# Altium PCB bikelight.pcbdoc
Units mil, origin at the board's own origin, x right, y up, seen from the top; angles counter-clockwise.
Board outline 2086.61 x 787.4 mil, 2 copper layers (Top Layer, Bottom Layer), stack 63.824 mil thick; 17 components, 13 nets, 46 pads, 0 vias.
Unrouted connection lines stored in the file: 1.
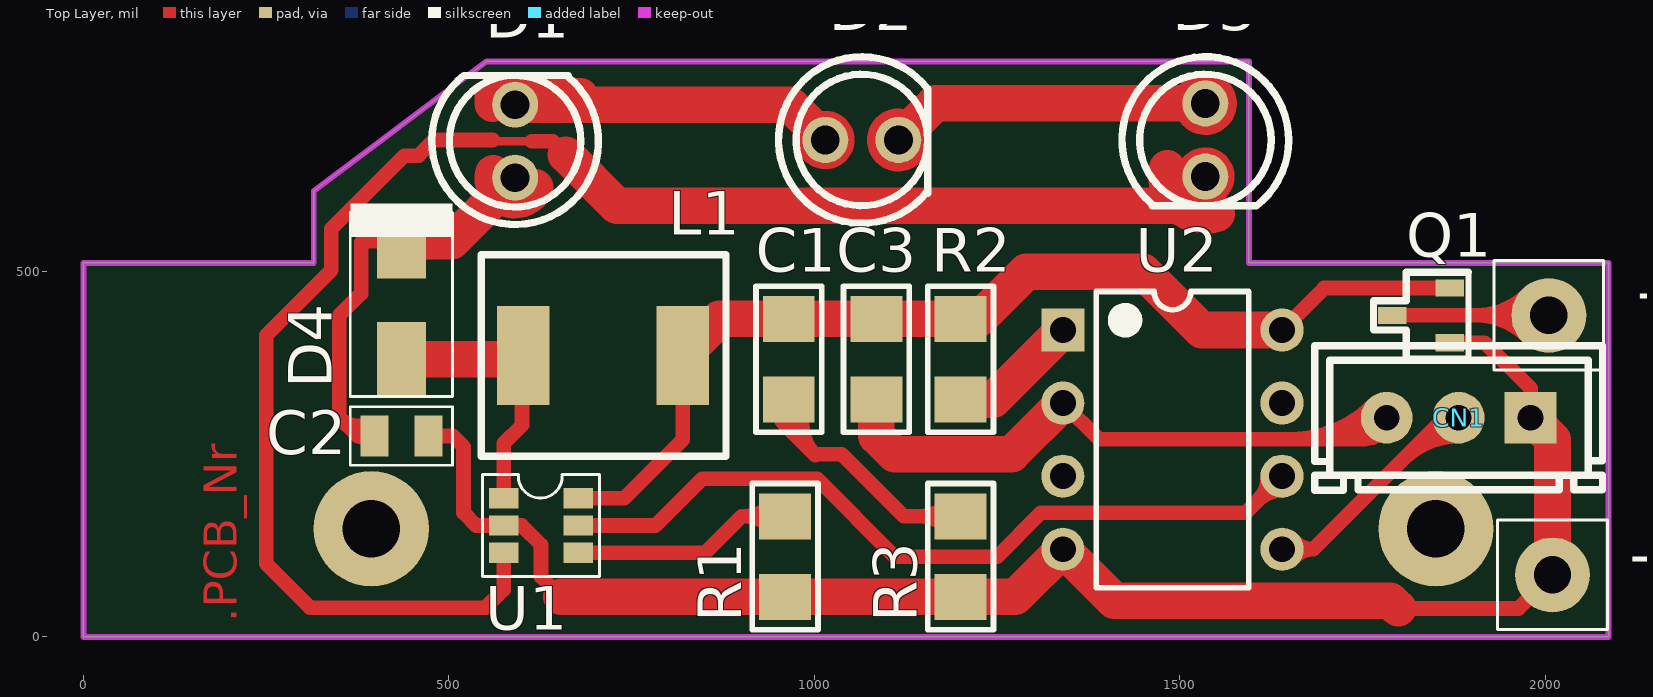
[diagram p0: Top Layer view]
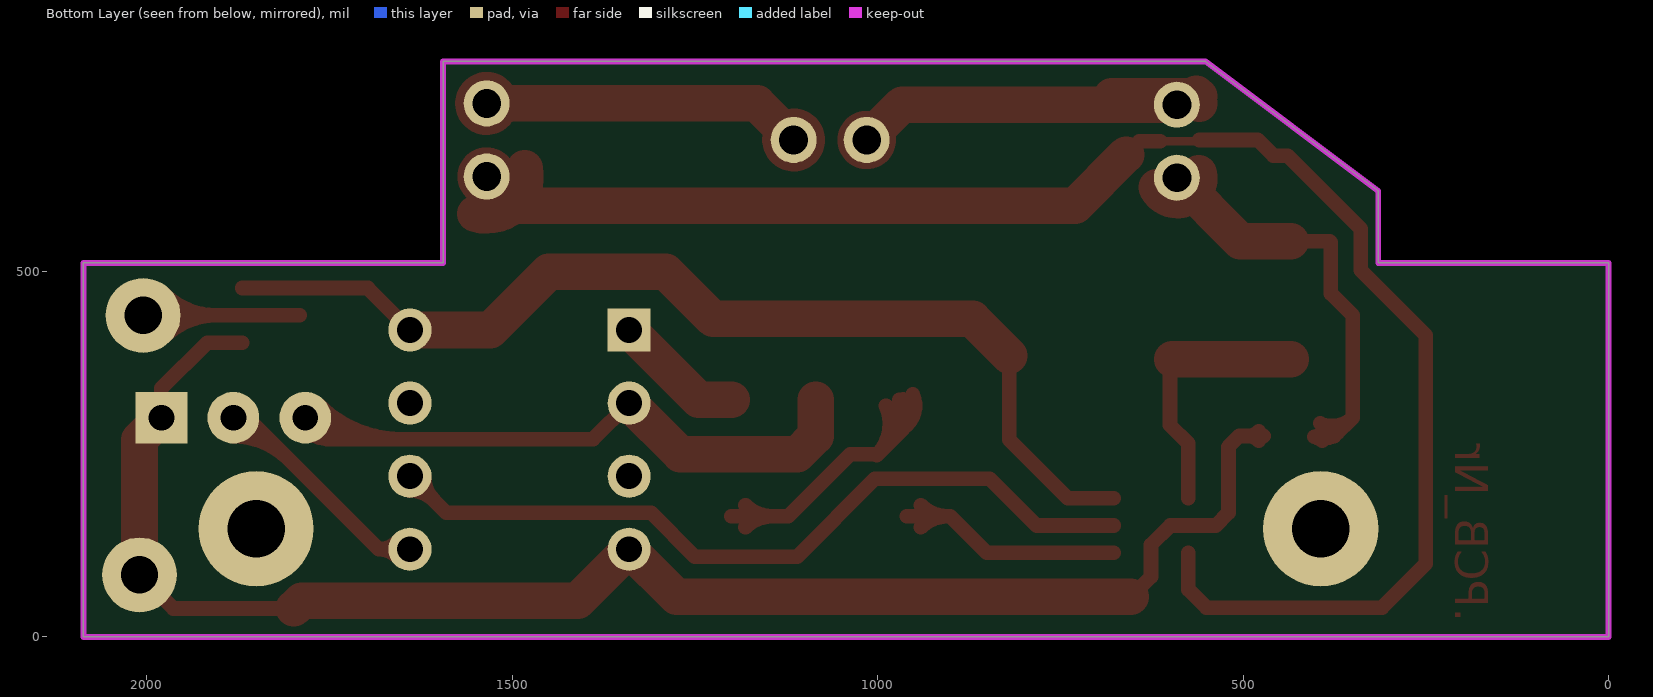
[diagram p1: Bottom Layer view, seen from below]
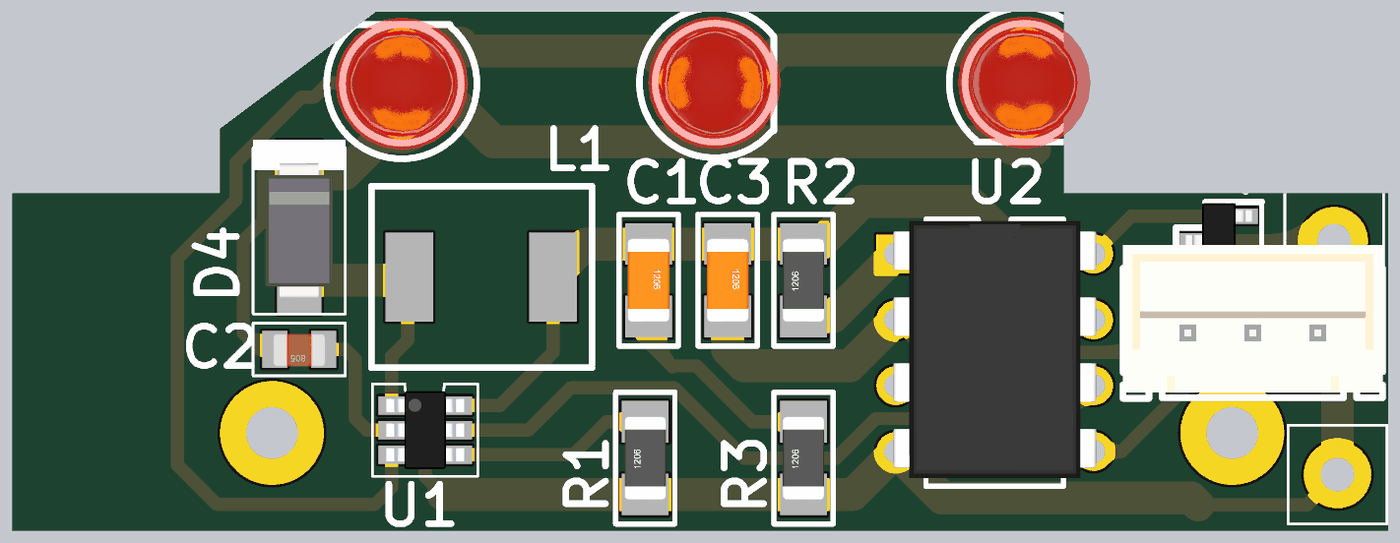
[diagram p2: 3D render of the assembled board from above, using the file's embedded part models]

## Layer stack, top to bottom
Top Layer: signal copper 1.4
Dielectric: core 61.0236, FR-4, Dk 4.8
Bottom Layer: signal copper 1.4

## Board outline
0,0 0,511.81 314.96,511.81 314.96,610.24 551.18,787.4 1594.49,787.4 1594.49,511.81 2086.61,511.81 2086.61,0

## Design rules (kind name [scope] priority, off if disabled: settings)
Clearance Clearance_U1 [InComponent('U1')] p1: gap=5
Clearance [All] p2: gap=10
FabricationTestPointUsage TestPointUsage [All] p1: valid=0 allowmultiple=FALSE
FabricationTestpoint Testpoint [All] p1: side=3 testpointundercomponent=TRUE minsize=40 maxsize=100 preferedsize=60 minholesize=0 maxholesize=40 preferedholesize=32 testpointgrid=1 allowsidetop=TRUE allowsidebottom=TRUE usegrid=TRUE gridtolerance=0.01
MinimumSolderMaskSliver MinimumSolderMaskSliver_U1 [InComponent('U1')] p1: minsoldermaskwidth=1
MinimumSolderMaskSliver [All] p2: minsoldermaskwidth=10
PolygonConnect [All] p1: connectstyle=Relief reliefconductorwidth=10 reliefentries=4 polygonreliefangle="90 Angle"
RoutingVias [All] p1: holewidth=28 width=50 viastyle="Through Hole" minholewidth=28 minwidth=50 maxholewidth=28 maxwidth=50
SilkscreenOverComponentPads [All] p1: minsilkscreentomaskgap=10
SolderMaskExpansion [All] p1: expansion=4
Width [All] p1: maxlimit=100 minlimit=12 preferedwidth=20
24 further rules are at their usual default settings.

## Components (designator, comment, footprint, x,y, rotation, side; value= is the part's Value field where it differs from the comment)
C1 "YCAM10U" CA_1206 965,380 r270 top
C2 "YCAM1U-1" CA_0805 435,275 r0 top
C3 "YCAM10U" CA_1206 1085,380 r270 top
CN1 "CNXH003M1" CN_B3B-XH-A 1980,300 r0 top
D1 "L-7113SEC-J3" DI_LED_5MM 590.55,728.35 r270 top locked
D2 "L-7113SEC-J3" DI_LED_5MM 1115,680 r180 top locked
D3 "L-7113SEC-J3" DI_LED_5MM 1535,630 r90 top locked
D4 "MBRA140TRPBF" DI_DO-214AC 435,380 r90 top
L1 "6.8uH/2.8A" CL_VISHAY_IHLP-2525CZ-01 820,385 r180 top
Q1 "NDS332P" SC_SOT23 1830,440 r180 top
R1 "YRES1K5" RE_1206 960,110 r90 top
R2 "YRES10K" RE_1206 1200,380 r90 top
R3 "YRES0E" RE_1206 1200,110 r90 top
TP1 "CN001M1" CN_TP_TH_1.3mm 2005,440 r0 top
TP2 "CN001M1" CN_TP_TH_1.3mm 2010,85 r0 top
U1 "LT1923ES6" SC_SOT23-6 575,190 r0 top
U2 "ATTINY13A-PU" SC_PDIP8 1340,420 r0 top

## Footprints (in the part's own frame and the unit in brackets; to place one, negate y for a bottom-side part, rotate by r counter-clockwise, add the part's x,y. Pads: shape width x height; smd on the part's side, far side on the other; paste and mask are expansions set on the pad)
CA_0805 [mil] "CA_0805"
  rect 38x56 smd: 1(-37,0) 2(37,0)
  silkscreen extent -70,-40 70,40, body extent -39,-26 39,24, height 31
CA_1206 [mm] "Chip Capacitor; Body 3.2 x 1.6 mm (LxW typ)"
  rect 1.6x1.8 smd: 1(-1.4,0) 2(1.4,0)
  silkscreen extent -2.54,-1.14 2.54,1.14, body extent -1.6,-0.8 1.6,0.8, height 1
CL_VISHAY_IHLP-2525CZ-01 [mm]
  rect 1.83x3.43 smd: 1(0,0) 2(5.54,0)
  silkscreen extent -1.5,-3.5 7,3.5
CN_B3B-XH-A [mm] "3p. PCB connector - 180°"
  rect 1.8x1.8 hole 0.9: 1(0,0)
  round 1.8 hole 0.9: 2(-2.5,0) 3(-5,0)
  silkscreen extent -7.5,-2.52 2.5,2.5, body extent -7.5,-2.3 2.5,3.4, height 7
CN_TP_TH_1.3mm [mm]
  round 2.6 hole 1.3: 1(0,0)
  silkscreen extent -1.91,-1.91 1.91,1.91, body extent -2.98,-2.99 3,2.99, height 1
DI_DO-214AC [mm] "SMA"
  rect 2.6x1.7 smd: 1(0,0) 2(4.1,0)
  silkscreen extent -1.3,-1.78 5.41,1.78, body extent -0.7,-1.3 4.5,1.3, height 2.4
DI_LED_5MM [mm] "LED 5mm"
  round 1.6 hole 1: 1(0,0) 2(2.54,0)
  silkscreen extent -1.02,-2.9 4.16,2.89, body extent -1.28,-2.55 3.82,2.55, height 8.6
RE_1206 [mm] "Chip Resistor; Body 3.2 x 1.6 mm (LxW typ)"
  rect 1.6x1.8 smd: 1(-1.4,0) 2(1.4,0)
  silkscreen extent -2.54,-1.14 2.54,1.14, body extent -1.6,-0.8 1.6,0.8, height 1
SC_PDIP8 [mm] "DIP, 8-Leads, Row Spacing 7.62mm, Pitch 2.54mm, Body 9.91x6.35mm"
  rect 1.5x1.5 hole 0.9: 1(0,0)
  round 1.5 hole 0.9: 2(0,-2.54) 3(0,-5.08) 4(0,-7.62) 5(7.62,-7.62) 6(7.62,-5.08) 7(7.62,-2.54) 8(7.62,0)
  silkscreen extent 1.16,-8.96 6.46,1.34, body extent -0.1,-8.64 7.72,1.27, height 8.57
SC_SOT23 [mm] "SOT23, 3-Leads, Body 2.9x1.3mm, Pitch 0.95mm, Lead Span 2.3mm, IPC High Density"
  rect 1x0.6 smd: 1(-1,0.95) 2(-1,-0.95) 3(1,0)
  silkscreen extent -1.65,-1.5 1.65,1.5, body extent -1.27,-1.46 1.27,1.46, height 0.99
SC_SOT23-6 [mil] "SC_SOT23-6"
  rect 40x28 smd: 1(0,0) 2(0,-37.5) 3(0,-75) 4(102,-75) 5(102,-37.5) 6(102,0)
  silkscreen extent -29,-108 131,32, body extent -8,-97 110,22, height 51

## Part data
L1: library part LQH6PPN6R8M43L
R1 R2 R3: "Resistor"
U1: library part LT1932ES6

## Free pads (board coordinates)
  round 157.48 hole 78.74: 0(1850.39,148.11) 1(393.7,148.11)

## Nets (pads, with @x,y where several pads share a name; then routed paths per layer and width w, separated by ;. In a path a pad name is that pad's centre, name@x,y a point inside that pad or via, vN(x,y) a via of type N, cw(c..) or ccw(c..) an arc to the next point about the centre after c; other vN are vias at no path point)
GND: C1.2 C2.2 CN1.1 Q1.1 R1.1 R3.1 R3.2 TP2.1 U1.2 U2.4 | length 2861.6
  Top Layer w20: C2.2 505,275 520,260 520,170 537.5,152.5 U1.2 599.78,152.5 626,126.28 626,82.5 653.62,54.88 ; C2.2@478.36,268.64 cw(c493.73,253.27) 493.73,275 cw(c493.73,296.73) C2.2@478.36,281.36 ; C1.2@952.01,332.35 ccw(c986.82,316.99) 959.91,290.09 ; C1.2@953.18,306.93 cw(c938.76,285) 965,285 ; C1.2 965,285 ; C1.2@970.31,324.28 ccw(c1015.47,304.35) 980.56,269.44 ; C1.2@976.82,306.93 ccw(c991.24,285) 965,285 ; C1.2@988.6,316.2 ccw(c1044.12,291.7) 1001.21,248.79 965,285 ; 1001.21,250 1037.57,250 1122.46,165.12 R3.2 ; R3.2@1180.86,149.92 ccw(c1144.17,113.22) 1144.17,165.12 ccw(c1144.17,217.01) R3.2@1180.86,180.32 ; 1798.65,39 1964,39 TP2.1 ; Q1.1 1917.4,402.6 1980,340 CN1.1
  Top Layer w50: 653.62,54.88 R1.1 R3.1 1274.88,54.88 U2.4 1410.63,49.37 1788.28,49.37 1798.65,39 ; CN1.1 2010,270 TP2.1
NetC2_1: C2.1 D1.2 D4.2 | length 763.5
  Top Layer w20: 370.24,279.76 ccw(c390.54,300.07) C2.1@402.63,274.02 ; C2.1@391.64,268.64 ccw(c376.27,253.27) 376.27,275 ccw(c376.27,296.73) C2.1@391.64,281.36 ; C2.1@394.21,292.16 cw(c377.71,327.71) 350,300 ; C2.1 375,275 350,300 ; D4.2 381.42,541.42 380,540 380,470 350,440 350,300
  Top Layer w50: D4.2 503.62,541.42 D1.2 ; D1.2@560.51,634.13 ccw(c590.55,628.35) D1.2@618.29,615.44
NetC3_2: C3.2 CN1.3 U2.2 | length 1135.8
  Top Layer w20: U2.2 1389.53,270.47 1753.62,270.47 ; 1650.46,270.47 ccw(c1650.46,432.69) CN1.3@1765.17,317.98 ; 1698.75,270.47 ccw(c1698.75,384.4) CN1.3@1779.31,303.84 ; 1747.03,270.47 ccw(c1747.03,336.12) CN1.3@1793.45,289.7 ; CN1.3@1758.92,292.27 cw(c1738.38,285.72) 1753.62,270.47 ; CN1.3@1775.42,275.77 ccw(c1768.87,255.23) 1753.62,270.47 ; CN1.3 1753.62,270.47
  Top Layer w50: C3.2 1085,275 1110,250 1270,250 U2.2
NetCN1_2: CN1.2 U2.5 | length 509.7
  Top Layer w20: U2.5 1682.64,120 ; U2.5@1654.78,107.24 cw(c1682.64,83.21) 1682.64,120 ; U2.5@1654.78,132.76 ccw(c1682.64,156.79) 1682.64,120 ; 1805.84,243.2 cw(c1881.57,167.46) CN1.2@1881.57,274.57 ; 1839.98,277.34 cw(c1881.57,235.75) CN1.2@1881.57,294.57 ; CN1.2 1862.64,300 1682.64,120
NetD1_1: D1.1 D2.2 | length 673.2
  Top Layer w50: D1.1@559.98,729.59 cw(c590.55,728.35) D1.1@563.92,743.41 ; 560,740 680,740 ; D1.1 966.65,728.35 D2.2 ; D2.2@1030,680 ccw(c1015,680) D2.2@1030,680
NetD2_1: D2.1 D3.2 | length 663.3
  Top Layer w50: D2.1 1165,730 D3.2 ; D3.2@1552.6,726.09 cw(c1535,730) D3.2@1553.03,730 ; D2.1@1133.03,680 ccw(c1115,680) D2.1@1133.03,680
NetD3_1: D3.1 U1.3 | length 2410.5
  Top Layer w12: 560,680 561.65,678.35 613.38,678.35
  Top Layer w20: 560,680 480,680 458.35,658.35 439,658.35 338.96,558.31 338.96,501.87 250,412.91 250,100 310,40 550,40 575,65 U1.3 ; 613.38,678.35 641.65,678.35 660,660
  Top Layer w50: 660,660 730,590 1495,590 D3.1 ; 1483.11,641.53 ccw(c1535,630) 1550.27,579.09 ; D3.1@1550,630 ccw(c1535,630) D3.1@1550,630
NetD4_1: D4.1 L1.2 U1.1 | length 363.5
  Top Layer w20: U1.1 575,265 600,290 600,376.89 L1.2@596.89,380
  Top Layer w50: D4.1 L1.2@596.89,380
NetQ1_3: Q1.3 TP1.1 | length 370.5
  Top Layer w20: Q1.3 TP1.1 ; TP1.1@1975.88,410.88 ccw(c1905.58,340.58) 1905.58,440 ccw(c1905.58,539.42) TP1.1@1975.88,469.12
NetR1_2: R1.2 U1.4 | length 385.3
  Top Layer w20: U1.4 850.46,115 900.58,165.12 R1.2 ; R1.2@940.86,149.92 ccw(c904.17,113.22) 904.17,165.12 ccw(c904.17,217.01) R1.2@940.86,180.32
NetR2_1: R2.1 U2.1 | length 179.4
  Top Layer w50: R2.1 1244.88,324.88 U2.1
NetU1_5: U1.5 U2.6 | length 1153.3
  Top Layer w20: U1.5 782.5,152.5 846.61,216.61 1003.72,216.61 1110.33,110 1250,110 1310,170 1590,170 U2.6 ; U2.6@1620.47,220 cw(c1573.33,220) 1606.66,186.66 cw(c1640,153.33) U2.6@1640,200.47
VCC: C1.1 C3.1 L1.1 Q1.2 R2.2 U1.6 U2.8 | length 1445.1
  Top Layer w20: U1.6 740,190 820,270 L1.1 ; U2.8 1697.4,477.4 Q1.2
  Top Layer w50: L1.1 870.12,435.12 C1.1 C3.1 R2.2 1225.12,435.12 1290,500 1450,500 1530,420 U2.8
pads on no net: U2.3 U2.7

## Keep-outs
Keep-Out Layer:
  the board outline again, w8

## Other copper
Top Layer:
  text ".PCB_Nr" at 210,20 h45 r90

## Silkscreen, mask and mechanical layers (free items; w line width, h text height)
Mechanical 4:
  lines w5: -2460,-3040 -2660,-3040 ; -1260,2510 -2460,2510 ; -760,-3040 -760,-2840 ; -760,2510 -760,2710 ; 240,-2539 4740,-2539 ; 240,-2239 4740,-2239 ; 240,-1939 1740,-1939 ; 1140,-3040 1140,-2840 ; 1140,2510 1140,2710 ; 1740,-2839 1740,-2239 1740,-1639 ; 3040,-3040 3040,-2840 ; 3040,2510 3040,2710 ; 3840,-2839 3840,-2239 ; 4740,-3040 4940,-3040 ; -2660,-3040 4940,-3040 ; -2660,-3040 -2660,2710 4940,2710 4940,-3040 ; -2460,2510 4740,2510 4740,-2840 -2460,-2840 -2460,2510 ; 240,-2839 240,-1639 ; 240,-2839 4740,-2839 4740,-1639 1740,-1639 ; 240,-2839 -1160,-2839 -1160,-1639 240,-1639 ; 240,-1639 1740,-1639 ; -2660,-165 -2460,-165 -2660,-165 ; 4740,-165 4940,-165 4740,-165
  text "A" at 3975,2629 h70 r90
  text "D" at -1675,2579 h70 r270
  text "C" at 200,2579 h70 r270
  text "B" at 2000,2579 h70 r270
  text "2" at -2525,1304 h70 r90
  text "2" at 4875,1304 h70 r90
  text "1" at -2525,-1571 h70 r90
  text "1" at 4875,-1571 h70 r90
  text "ENGINEER:" at 290,-1739 h45
  text "TITLE:" at 1790,-1739 h45
  text ".ProjectName" at 2040,-2007 h98.43
  text "PCB DESIGNER:" at 290,-2034 h45
  text ".DrawnByX" at 795,-2151 h98.43
  text "DATE:" at 290,-2339 h45
  text "PART NO.:" at 1790,-2339 h45
  text "REV:" at 3890,-2339 h45
  text ".PRINT_DATE" at 340,-2459 h70
  text ".RevisionNR" at 3892,-2472 h98.43
  text "FILE NAME:" at 290,-2639 h45
  text "DWG NO:" at 1790,-2639 h45
  text "SCALE:" at 3890,-2639 h45
  text ".PCB_Nr" at 2143,-2735 h98.43
  text ".PCB_FILE_NAME_NO_PATH" at 340,-2759 h70
  text "D" at -1793,-2965 h70 r270
  text "C" at 97,-2965 h70 r270
  text "B" at 2007,-2965 h70 r270
  text "A" at 3899,-2965 h70 r270
Mechanical 5:
  lines w5: -2460,-3040 -2660,-3040 ; -2460,-2539 2040,-2539 ; -2460,-2239 2040,-2239 ; -1560,-2839 -1560,-2239 ; -760,-3040 -760,-2840 ; -760,2510 -760,2710 ; 540,-2839 540,-2239 540,-1639 ; 540,-1939 2040,-1939 ; 1140,-3040 1140,-2840 ; 1140,2510 1140,2710 ; 3040,-3040 3040,-2840 ; 3040,2510 3040,2710 ; 3540,2510 4740,2510 ; 4740,-3040 4940,-3040 ; -2660,-3040 4940,-3040 ; -2660,-3040 -2660,2710 4940,2710 4940,-3040 ; 540,-1639 -2460,-1639 -2460,-2839 2040,-2839 ; 540,-1639 2040,-1639 ; 2040,-2839 2040,-1639 ; 2040,-2839 3440,-2839 3440,-1639 2040,-1639 ; 4740,2510 -2460,2510 -2460,-2840 4740,-2840 4740,2510 ; -2660,-165 -2460,-165 -2660,-165 ; 4740,-165 4940,-165 4740,-165
  text "A" at -1675,2629 h70 r270
  text "B" at 200,2629 h70 r270
  text "C" at 2000,2629 h70 r270
  text "D" at 3900,2629 h70 r270
  text "2" at -2600,1304 h70 r270
  text "2" at 4800,1304 h70 r270
  text "1" at -2600,-1571 h70 r270
  text "1" at 4800,-1571 h70 r270
  text "TITLE:" at 490,-1739 h45
  text "ENGINEER:" at 1990,-1739 h45
  text ".ProjectName" at 275,-1999 h98.43
  text "PCB DESIGNER:" at 1990,-2034 h45
  text ".DrawnByX" at 1500,-2154 h98.43
  text "REV:" at -1610,-2339 h45
  text "PART NO.:" at 490,-2339 h45
  text "DATE:" at 1990,-2339 h45
  text ".PRINT_DATE" at 1940,-2459 h70
  text ".RevisionNR" at -1578,-2514 h98.43
  text "SCALE:" at -1610,-2639 h45
  text "DWG NO:" at 490,-2639 h45
  text "FILE NAME:" at 1990,-2639 h45
  text ".PCB_FILE_NAME_NO_PATH" at 1940,-2759 h70
  text ".PCB_Nr" at 185,-2769 h98.43
  text "B" at 100,-2921 h70 r270
  text "C" at 2000,-2921 h70 r270
  text "D" at 3900,-2921 h70 r270
  text "A" at -1800,-2971 h70 r270
Mechanical 8:
  the board outline again, w8
Drill Drawing:
  lines w8: -2360,-1440 -2360,-1540 -2260,-1540 ; -2360,2360 -2360,2460 -2260,2460 ; 4540,-1540 4640,-1540 4640,-1440 ; 4540,2460 4640,2460 4640,2360
  text ".Legend" at 10,990 h60